# Altium PCB Driver4Rack.PcbDoc
Units mm, origin at the board's own origin, x right, y up, seen from the top; angles counter-clockwise.
Board outline 100 x 130 mm, 2 copper layers (Top Layer, Bottom Layer); 109 components, 96 nets, 554 pads, 60 vias.
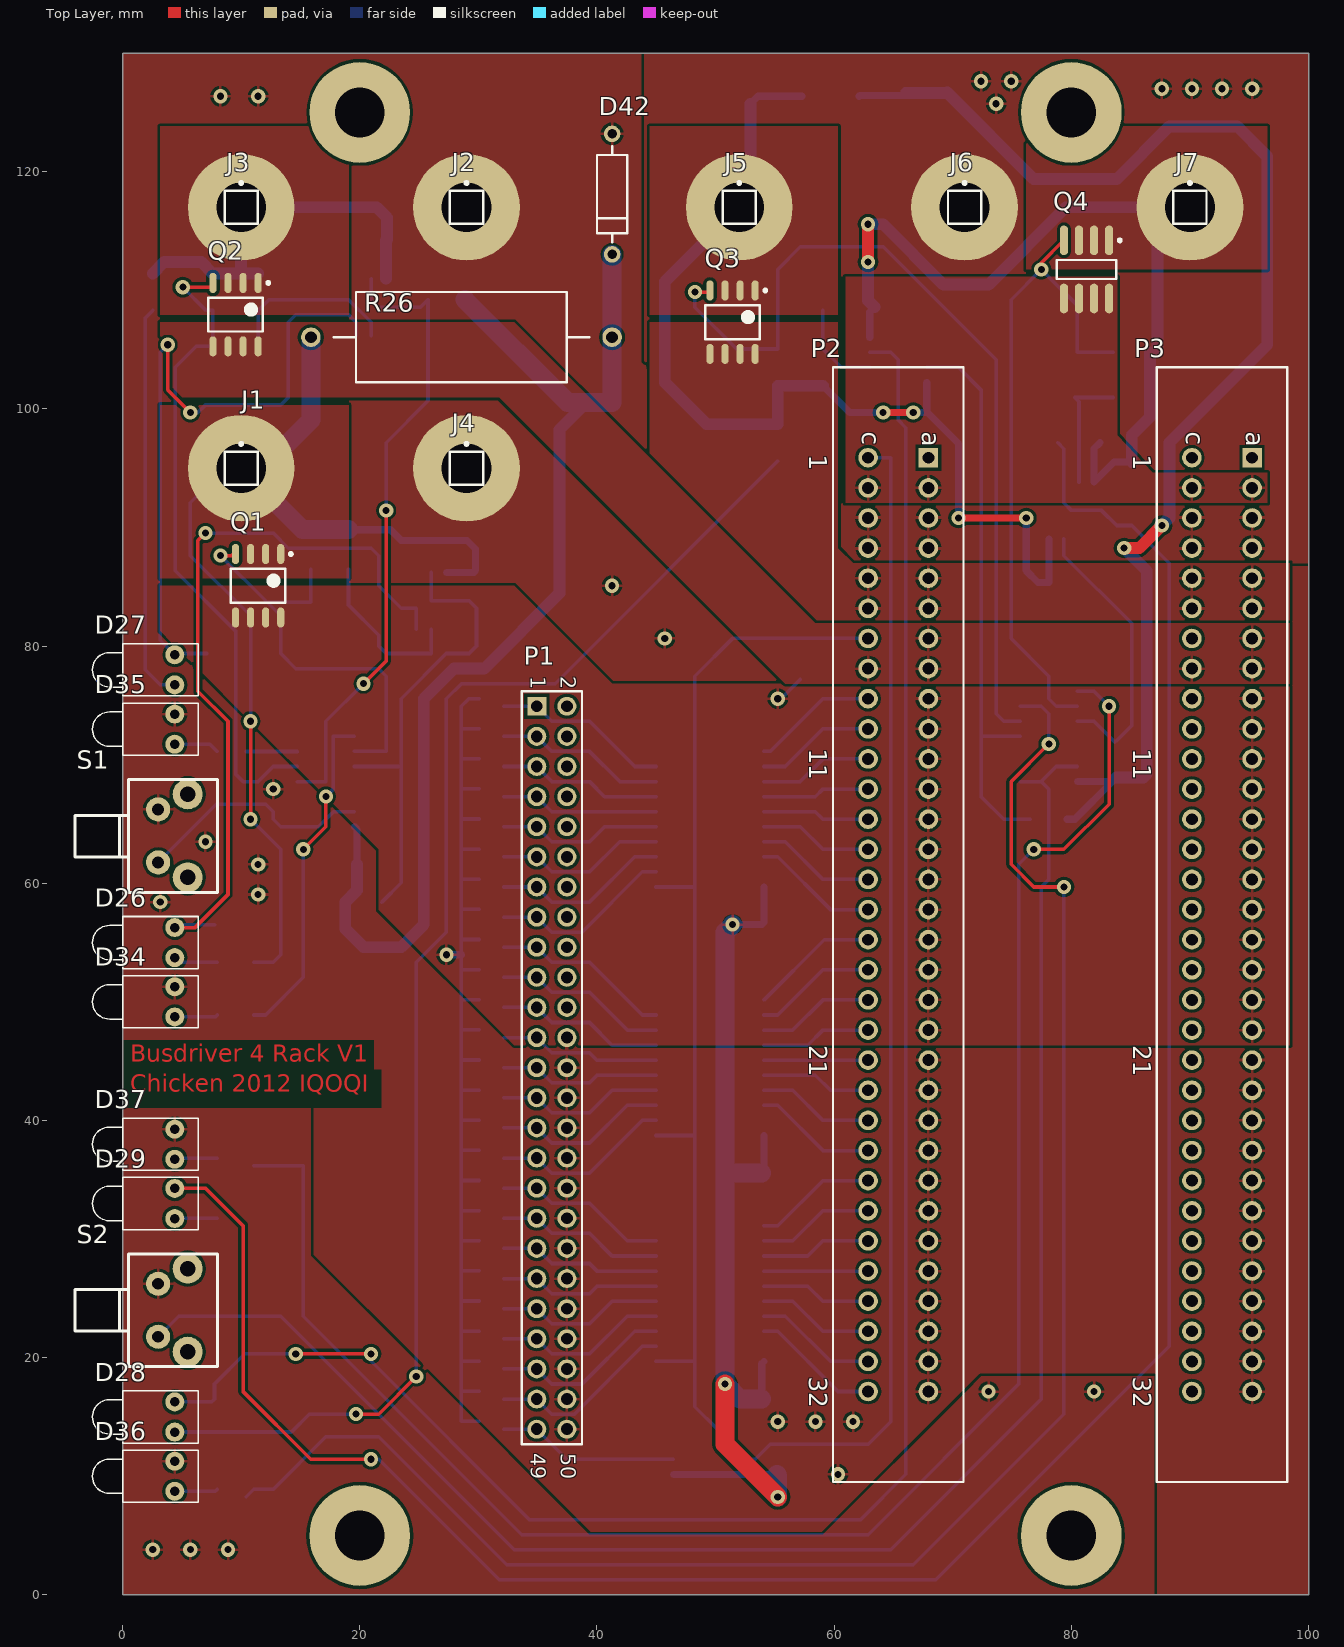
[diagram p0: Top Layer view]
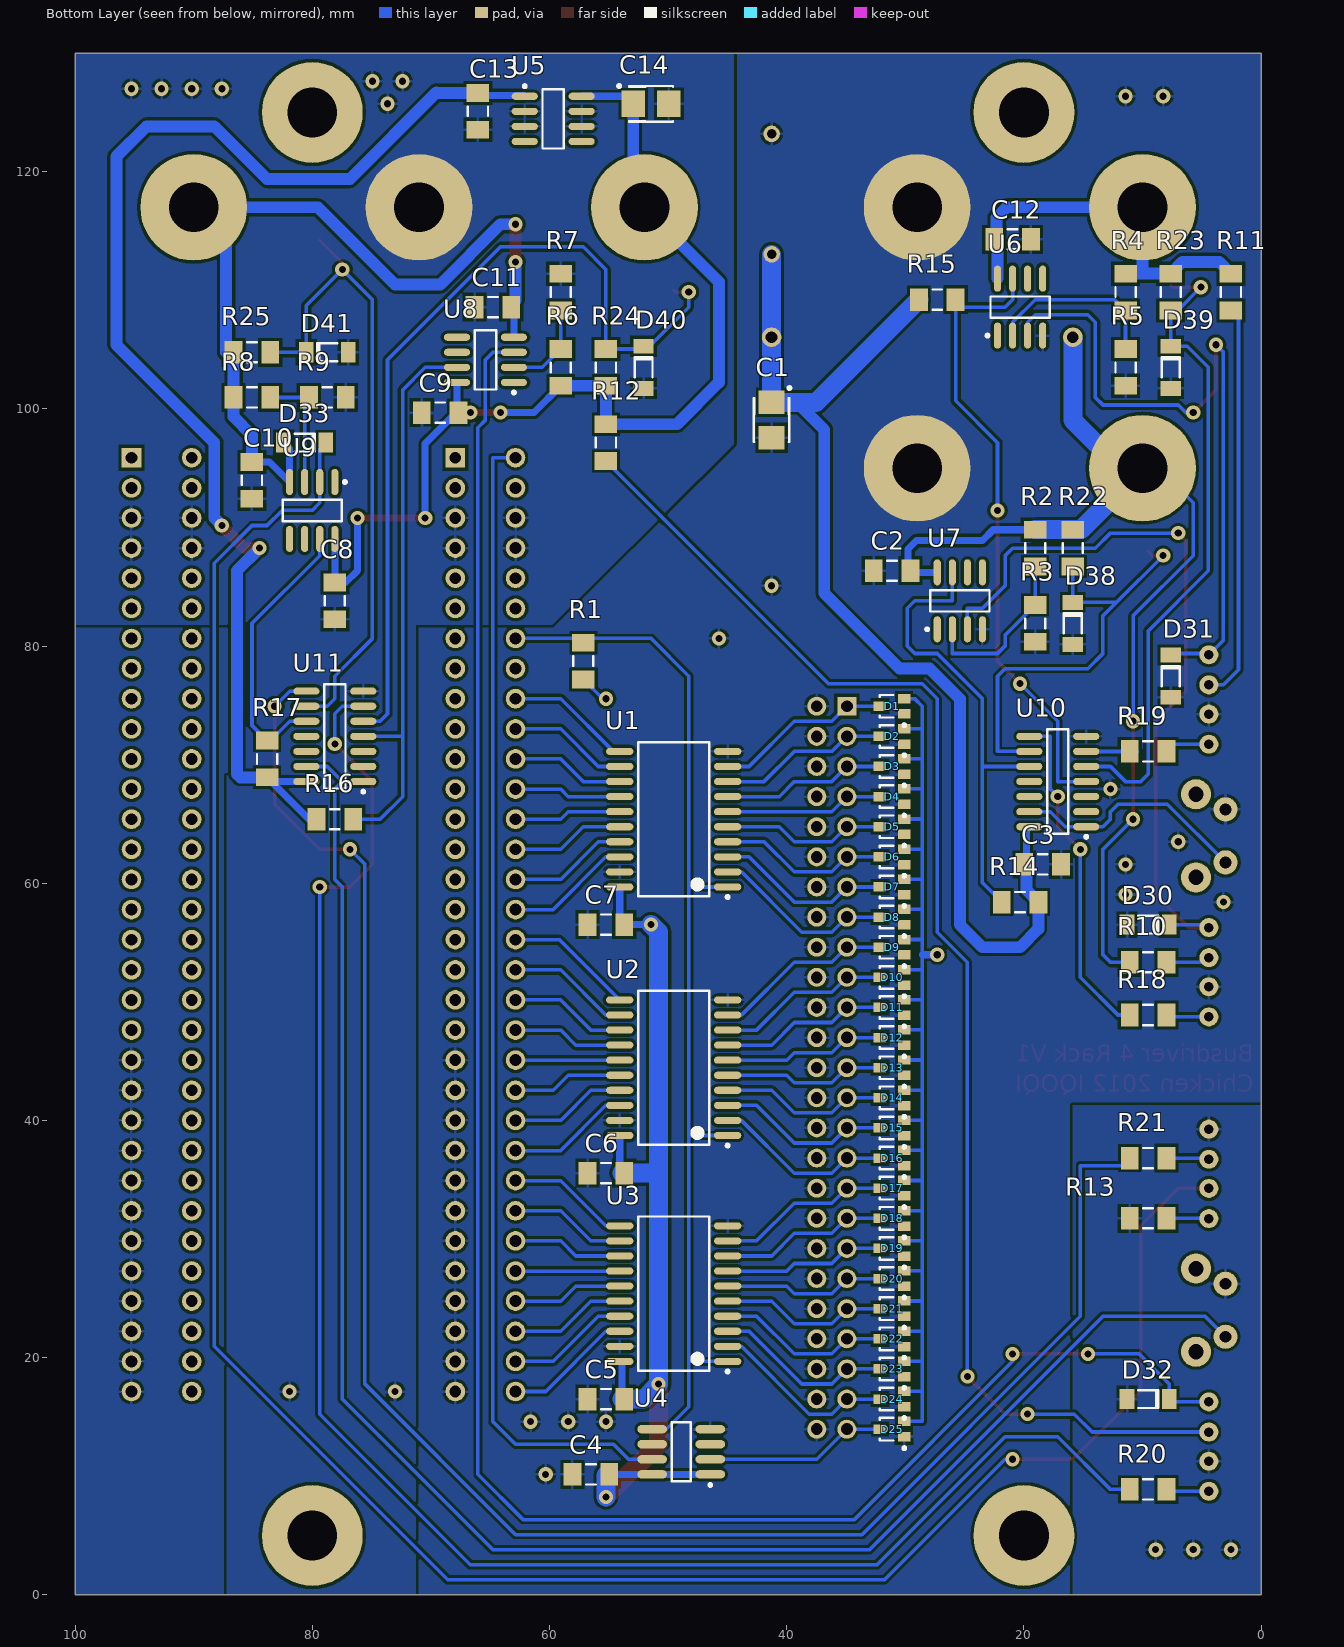
[diagram p1: Bottom Layer view, seen from below]

## Layer stack, top to bottom
Top Layer: signal copper 0.0356
Dielectric: dielectric 0.32, FR-4, Dk 4.8
Bottom Layer: signal copper 0.0356

## Board outline
0,0 100,0 100,130 0,130

## Design rules (kind name [scope] priority, off if disabled: settings)
Clearance Clearance_2 [InNet('+5V','++5V','+24V','++24V','+18V','++18V','-18V','--18V','DGND','AGND') vs InNet('+5V','++5V','+24V','++24V','+18V','++18V','-18V','--18V','DGND','AGND')] p1 off: gap=0.5
Clearance [All] p2: gap=0.254
HoleSize [All] p1: absolutevalues=TRUE maxlimit=5 minlimit=0.025 maxpercent=80.000 minpercent=20.000
PolygonConnect PolygonConnect_2 [InNet('+5V','++5V','+24V','++24V','+18V','++18V','-18V','--18V','DGND','AGND') vs ((ObjectKind = 'Pad') And (HoleDiameter = AsMM(4.2))) Or InComponent('Q1','Q2','Q3','Q4')] p1: connectstyle=Direct reliefconductorwidth=0.254 reliefentries=4 polygonreliefangle="90 Angle"
PolygonConnect [All] p2: connectstyle=Relief reliefconductorwidth=0.254 reliefentries=4 polygonreliefangle="90 Angle"
RoutingVias [All] p1: holewidth=0.6 width=1.2 viastyle="Through Hole" minholewidth=0.4 minwidth=1 maxholewidth=1 maxwidth=2
SilkscreenOverComponentPads [All] p1: minsilkscreentomaskgap=0.254
SolderMaskExpansion [All] p1: expansion=0.102
Width [All] p1: maxlimit=5 minlimit=0.254 preferedwidth=0.254
26 further rules are at their usual default settings.

## Components (designator, comment, footprint, x,y, rotation, side; value= is the part's Value field where it differs from the comment)
C1 "Cap Pol1" TC3528-1411 41.275,99.06 r270 bottom
C2 "Cap" CAPC3216M 31.115,86.36 r180 bottom
C3 "Cap" CAPC3216M 18.415,61.595 r0 bottom
C4 "Cap" CAPC3216M 56.515,10.16 r180 bottom
C5 "Cap" CAPC3216M 55.245,16.51 r180 bottom
C6 "Cap" CAPC3216M 55.245,35.56 r180 bottom
C7 "Cap" CAPC3216M 55.245,56.515 r180 bottom
C8 "Cap" CAPC3216M 78.105,83.82 r90 bottom
C9 "Cap" CAPC3216M 69.215,99.695 r180 bottom
C10 "Cap" CAPC3216M 85.09,93.98 r270 bottom
C11 "Cap" CAPC3216M 64.77,108.585 r0 bottom
C12 "Cap" CAPC3216M 20.955,114.3 r0 bottom
C13 "Cap" CAPC3216M 66.04,125.095 r90 bottom
C14 "Cap Pol1" TC3528-1411 51.435,125.73 r180 bottom
D1 "1PS70SB14" SOT323 31.115,74.93 r90 bottom
D2 "1PS70SB14" SOT323 31.115,72.39 r90 bottom
D3 "1PS70SB14" SOT323 31.115,69.85 r90 bottom
D4 "1PS70SB14" SOT323 31.115,67.31 r90 bottom
D5 "1PS70SB14" SOT323 31.115,64.77 r90 bottom
D6 "1PS70SB14" SOT323 31.115,62.23 r90 bottom
D7 "1PS70SB14" SOT323 31.115,59.69 r90 bottom
D8 "1PS70SB14" SOT323 31.115,57.15 r90 bottom
D9 "1PS70SB14" SOT323 31.115,54.61 r90 bottom
D10 "1PS70SB14" SOT323 31.115,52.07 r90 bottom
D11 "1PS70SB14" SOT323 31.115,49.53 r90 bottom
D12 "1PS70SB14" SOT323 31.115,46.99 r90 bottom
D13 "1PS70SB14" SOT323 31.115,44.45 r90 bottom
D14 "1PS70SB14" SOT323 31.115,41.91 r90 bottom
D15 "1PS70SB14" SOT323 31.115,39.37 r90 bottom
D16 "1PS70SB14" SOT323 31.115,36.83 r90 bottom
D17 "1PS70SB14" SOT323 31.115,34.29 r90 bottom
D18 "1PS70SB14" SOT323 31.115,31.75 r90 bottom
D19 "1PS70SB14" SOT323 31.115,29.21 r90 bottom
D20 "1PS70SB14" SOT323 31.115,26.67 r90 bottom
D21 "1PS70SB14" SOT323 31.115,24.13 r90 bottom
D22 "1PS70SB14" SOT323 31.115,21.59 r90 bottom
D23 "1PS70SB14" SOT323 31.115,19.05 r90 bottom
D24 "1PS70SB14" SOT323 31.115,16.51 r90 bottom
D25 "1PS70SB14" SOT323 31.115,13.97 r90 bottom
D26 "green" LED-1 4.4,55 r180 top
D27 "green" LED-1 4.4,78 r180 top
D28 "green" LED-1 4.4,15 r180 top
D29 "green" LED-1 4.4,33 r180 top
D30 "3,9V" sod80c 9.525,56.515 r180 bottom
D31 "22V" sod80c 7.62,77.47 r90 bottom
D32 "15V" sod80c 9.525,16.51 r180 bottom
D33 "15V" sod80c 80.645,97.155 r180 bottom
D34 "Red" LED-1 4.4,50 r180 top
D35 "Red" LED-1 4.4,73 r180 top
D36 "Red" LED-1 4.4,10 r180 top
D37 "Red" LED-1 4.4,38 r180 top
D38 "5,1V" sod80c 15.875,81.915 r90 bottom
D39 "5,1V" sod80c 7.62,103.505 r90 bottom
D40 "5,1V" sod80c 52.07,103.505 r90 bottom
D41 "5,1V" sod80c 78.74,104.775 r0 bottom
D42 "5V1/1W" DIODE-0.4 41.275,118.11 r270 top
J1 "+5V" PIN1 10,95 r0 top
J2 "DGND" PIN1 29,117 r0 top
J3 "+24V" PIN1 10,117 r0 top
J4 "DGND" PIN1 29,95 r0 top
J5 "+18V" PIN1 52,117 r0 top
J6 "AGND" PIN1 71,117 r0 top
J7 "-18V" PIN1 90,117 r0 top
P1 "Header 25X2" HDR2X25 34.925,74.93 r270 top
P2 "2x32 Pin" 0903164x922 65.405,56.515 r270 top
P3 "2x32 Pin" 0903164x922 92.71,56.515 r270 top
Q1 "TPC8120" 2-6J1B 11.43,85.09 r270 top
Q2 "TPC8120" 2-6J1B 9.525,107.95 r270 top
Q3 "TPC8120" 2-6J1B 51.435,107.315 r270 top
Q4 "FDS6699S" SO-8_M 81.28,111.76 r270 top
R1 "Res2" RESC3216M 57.15,78.74 r270 bottom
R2 "Res2" RESC3216M 19.05,88.265 r90 bottom
R3 "Res2" RESC3216M 19.05,81.915 r90 bottom
R4 "Res2" RESC3216M 11.43,109.855 r90 bottom
R5 "Res2" RESC3216M 11.43,103.505 r90 bottom
R6 "Res2" RESC3216M 59.055,103.505 r270 bottom
R7 "Res2" RESC3216M 59.055,109.855 r270 bottom
R8 "Res2" RESC3216M 85.09,100.965 r0 bottom
R9 "Res2" RESC3216M 78.74,100.965 r0 bottom
R10 "Res2" RESC3216M 9.525,53.34 r0 bottom
R11 "Res2" RESC3216M 2.54,109.855 r90 bottom
R12 "Res2" RESC3216M 55.245,97.155 r270 bottom
R13 "Res2" RESC3216M 9.525,31.75 r0 bottom
R14 "Res2" RESC3216M 20.32,58.42 r0 bottom
R15 "Res2" RESC3216M 27.305,109.22 r180 bottom
R16 "Res2" RESC3216M 78.105,65.405 r180 bottom
R17 "Res2" RESC3216M 83.82,70.485 r90 bottom
R18 "Res2" RESC3216M 9.525,48.895 r180 bottom
R19 "Res2" RESC3216M 9.525,71.12 r180 bottom
R20 "Res2" RESC3216M 9.525,8.89 r180 bottom
R21 "Res2" RESC3216M 9.525,36.83 r180 bottom
R22 "Res2" RESC3216M 15.875,88.265 r90 bottom
R23 "Res2" RESC3216M 7.62,109.855 r90 bottom
R24 "Res2" RESC3216M 55.245,103.505 r270 bottom
R25 "Res2" RESC3216M 85.09,104.775 r0 bottom
R26 "Res2" AXIAL-1.0 28.575,106.045 r0 top
S1 "SW-PB" Print-Taster 3,64 r270 top
S2 "SW-PB" Print-Taster 3,24 r270 top
U1 "SN74HC245DW" DW020_N 49.53,65.405 r0 bottom
U2 "SN74HC245DW" DW020_N 49.53,44.45 r0 bottom
U3 "SN74HC245DW" DW020_N 49.53,25.4 r0 bottom
U4 "SN74LVC2T45DCTT" SO8_M 48.895,12.065 r0 bottom
U5 "MC78L05ABD" 751-05_N 59.69,124.46 r180 bottom
U6 "LM311D" 751-02_N 20.32,108.585 r90 bottom
U7 "LM311D" 751-02_N 25.4,83.82 r90 bottom
U8 "LM311D" 751-02_N 65.405,104.14 r0 bottom
U9 "LM311D" 751-02_N 80.01,91.44 r270 bottom
U10 "MC74HC74AD" 751A-03_N 17.145,68.58 r0 bottom
U11 "MC74HC74AD" 751A-03_N 78.105,72.39 r0 bottom

## Footprints (in the part's own frame and the unit in brackets; to place one, negate y for a bottom-side part, rotate by r counter-clockwise, add the part's x,y. Pads: shape width x height; smd on the part's side, far side on the other; paste and mask are expansions set on the pad)
2-6J1B [mm] "Mosfet Toshiba TPC8120"
  oval 1.7x0.6 smd: 1(-2.675,1.905) 2(-2.675,0.635) 3(-2.675,-0.635) 4(-2.675,-1.905) 5(2.675,-1.905) 6(2.675,-0.635) 7(2.675,0.635) 8(2.675,1.905)
  silkscreen extent -2.8,-2.3 1.42,2.88, body extent -2.1,-2.3 2.1,2.3, height 1.7
751-02_N [mm] "SOIC, 8-Leads, Body 4.9x3.9mm, Pitch 1.27mm, IPC Medium Density"
  oval 2.2x0.6 smd: 1(-2.4,1.905) 2(-2.4,0.635) 3(-2.4,-0.635) 4(-2.4,-1.905) 5(2.4,-1.905) 6(2.4,-0.635) 7(2.4,0.635) 8(2.4,1.905)
  silkscreen extent -2.52,-2.5 0.9,2.88, body extent -1.95,-2.45 1.95,2.45, height 1.75
751-05_N [mm] "SOIC, 8-Leads, Body 4.9x3.9mm, Pitch 1.27mm, IPC Medium Density"
  oval 2.2x0.6 smd: 1(-2.4,1.905) 2(-2.4,0.635) 3(-2.4,-0.635) 4(-2.4,-1.905) 5(2.4,-1.905) 6(2.4,-0.635) 7(2.4,0.635) 8(2.4,1.905)
  silkscreen extent -2.53,-2.5 0.9,2.88, body extent -1.95,-2.45 1.95,2.45, height 1.75
751A-03_N [mm] "SOIC, 14-Leads, Body 8.7x3.9mm, Pitch 1.27mm, IPC Medium Density"
  oval 2.2x0.6 smd: 1(-2.4,3.81) 2(-2.4,2.54) 3(-2.4,1.27) 4(-2.4,0) 5(-2.4,-1.27) 6(-2.4,-2.54) 7(-2.4,-3.81) 8(2.4,-3.81) 9(2.4,-2.54) 10(2.4,-1.27) 11(2.4,0) 12(2.4,1.27) 13(2.4,2.54) 14(2.4,3.81)
  silkscreen extent -2.52,-4.4 0.9,4.78, body extent -2,-4.38 2,4.38, height 1.75
0903164x922 [mm] "Connector; DIN 41612, Type C, Thru-Hole; Rows a+c, 64 Position; Vertical; No Mounting Fixture"
  rect 1.65x1.65 hole 1: A1(-39.37,2.54)
  round 1.65 hole 1: A2(-36.83,2.54) A3(-34.29,2.54) A4(-31.75,2.54) A5(-29.21,2.54) A6(-26.67,2.54) A7(-24.13,2.54) A8(-21.59,2.54) A9(-19.05,2.54) A10(-16.51,2.54) A11(-13.97,2.54) A12(-11.43,2.54) A13(-8.89,2.54) A14(-6.35,2.54) A15(-3.81,2.54) A16(-1.27,2.54) A17(1.27,2.54) A18(3.81,2.54) A19(6.35,2.54) A20(8.89,2.54) A21(11.43,2.54) A22(13.97,2.54) A23(16.51,2.54) A24(19.05,2.54) A25(21.59,2.54) A26(24.13,2.54) A27(26.67,2.54) A28(29.21,2.54) A29(31.75,2.54) A30(34.29,2.54) A31(36.83,2.54) A32(39.37,2.54) C1(-39.37,-2.54) C2(-36.83,-2.54) C3(-34.29,-2.54) C4(-31.75,-2.54) C5(-29.21,-2.54) C6(-26.67,-2.54) C7(-24.13,-2.54) C8(-21.59,-2.54) C9(-19.05,-2.54) C10(-16.51,-2.54) C11(-13.97,-2.54) C12(-11.43,-2.54) C13(-8.89,-2.54) C14(-6.35,-2.54) C15(-3.81,-2.54) C16(-1.27,-2.54) C17(1.27,-2.54) C18(3.81,-2.54) C19(6.35,-2.54) C20(8.89,-2.54) C21(11.43,-2.54) C22(13.97,-2.54) C23(16.51,-2.54) C24(19.05,-2.54) C25(21.59,-2.54) C26(24.13,-2.54) C27(26.67,-2.54) C28(29.21,-2.54) C29(31.75,-2.54) C30(34.29,-2.54) C31(36.83,-2.54) C32(39.37,-2.54)
  silkscreen extent -47,-5.5 47,5.5
AXIAL-1.0 [mm] "Axial Device, Thru-Hole; 2 Leads; 1.0 in Pin Spacing"
  round 1.65 hole 1: 1(-12.7,0) 2(12.7,0)
  silkscreen extent -10.79,-3.81 10.79,3.81
CAPC3216M [mm] "Chip Capacitor, Body 3.2x1.6mm, IPC Low Density"
  rect 1.5x1.9 smd: 1(-1.55,0) 2(1.55,0)
  silkscreen extent -0.4,-0.85 0.4,0.85, body extent -1.7,-0.9 1.7,0.9, height 1.35
DIODE-0.4 [mm] "Diode, Thru-Hole; 2 Leads; 0.4 in Pin Spacing"
  round 1.4 hole 0.8: 1(-5.08,0) 2(5.08,0)
  silkscreen extent -4.06,-1.27 4.06,1.27
DW020_N [mm] "SOIC, 20-Leads, Body 12.8x7.5mm, Pitch 1.27mm, IPC Medium Density"
  oval 2.3x0.6 smd: 1(-4.55,5.715) 2(-4.55,4.445) 3(-4.55,3.175) 4(-4.55,1.905) 5(-4.55,0.635) 6(-4.55,-0.635) 7(-4.55,-1.905) 8(-4.55,-3.175) 9(-4.55,-4.445) 10(-4.55,-5.715) 11(4.55,-5.715) 12(4.55,-4.445) 13(4.55,-3.175) 14(4.55,-1.905) 15(4.55,-0.635) 16(4.55,0.635) 17(4.55,1.905) 18(4.55,3.175) 19(4.55,4.445) 20(4.55,5.715)
  silkscreen extent -4.67,-6.5 3,6.69, body extent -3.75,-6.4 3.75,6.4, height 2.65
HDR2X25 [mm] "Connector; Header; 25x2 Position"
  rect 1.6x1.6 hole 1: 1(0,0)
  round 1.6 hole 1: 2(0,2.54) 3(2.54,0) 4(2.54,2.54) 5(5.08,0) 6(5.08,2.54) 7(7.62,0) 8(7.62,2.54) 9(10.16,0) 10(10.16,2.54) 11(12.7,0) 12(12.7,2.54) 13(15.24,0) 14(15.24,2.54) 15(17.78,0) 16(17.78,2.54) 17(20.32,0) 18(20.32,2.54) 19(22.86,0) 20(22.86,2.54) 21(25.4,0) 22(25.4,2.54) 23(27.94,0) 24(27.94,2.54) 25(30.48,0) 26(30.48,2.54) 27(33.02,0) 28(33.02,2.54) 29(35.56,0) 30(35.56,2.54) 31(38.1,0) 32(38.1,2.54) 33(40.64,0) 34(40.64,2.54) 35(43.18,0) 36(43.18,2.54) 37(45.72,0) 38(45.72,2.54) 39(48.26,0) 40(48.26,2.54) 41(50.8,0) 42(50.8,2.54) 43(53.34,0) 44(53.34,2.54) 45(55.88,0) 46(55.88,2.54) 47(58.42,0) 48(58.42,2.54) 49(60.96,0) 50(60.96,2.54)
  silkscreen extent -1.27,-1.27 62.23,3.81
LED-1 [mm] "LED; 2 Leads"
  round 1.6 hole 0.8: 1(0,1.27) 2(0,-1.27)
  silkscreen extent -2,-2.2 6.95,2.2
PIN1 [mm] "Connector; Plug"
  round 9 hole 4.2: 1(0,0)
  silkscreen extent -1.4,-1.4 1.4,2.17
Print-Taster [mil]
  round 100 hole 51.18: 0(-138,98) 0(138,98)
  round 80 hole 39.37: 1(-88,0) 2(88,0)
  silkscreen extent -186,-276 188,197
RESC3216M [mm] "Chip Resistor, Body 3.2x1.6mm, IPC Low Density"
  rect 1.5x1.9 smd: 1(-1.55,0) 2(1.55,0)
  silkscreen extent -0.4,-0.85 0.4,0.85, body extent -1.68,-0.87 1.68,0.87, height 0.71
SO8_M [mm] "SOIC, 8-Leads, Body 4.9x3.9mm, Pitch 1.27mm, IPC Low Density"
  oval 2.5x0.7 smd: 1(-2.45,1.905) 2(-2.45,0.635) 3(-2.45,-0.635) 4(-2.45,-1.905) 5(2.45,-1.905) 6(2.45,-0.635) 7(2.45,0.635) 8(2.45,1.905)
  silkscreen extent -2.57,-2.5 0.8,2.93, body extent -2,-2.5 2,2.5, height 1.75
SO-8_M [mm] "SOIC, 8-Leads, Body 4.9x3.9mm, Pitch 1.27mm, IPC Low Density"
  oval 2.5x0.7 smd: 1(-2.45,1.905) 2(-2.45,0.635) 3(-2.45,-0.635) 4(-2.45,-1.905) 5(2.45,-1.905) 6(2.45,-0.635) 7(2.45,0.635) 8(2.45,1.905)
  silkscreen extent -2.57,-2.5 0.8,2.93, body extent -2,-2.5 2,2.5, height 1.75
sod80c [mm] "Metal Electrode Face (MELF) Diode; Body 3.5 x 1.6 mm (LxDia)"
  rect 1.25x1.7 smd: 1(-1.775,0) 2(1.775,0)
  silkscreen extent -0.85,-0.75 0.85,0.75
SOT323 [mm] "SOT-323/SC-70; 3 Leads; Body 2.2 x 2.2 mm, inc. leads (LxW max)"
  rect 0.8x1.05 smd: 1(-0.65,-1.025) 2(0.65,-1.025) 3(0,1.025)
  silkscreen extent -1.72,-1.15 0.95,1.03
TC3528-1411 [mm] "Capacitor, SM Tantalum; Body 3.5 x 2.8 mm (LxW typ)"
  rect 2x2.2 smd: 1(-1.5,0) 2(1.5,0)
  silkscreen extent -2.82,-1.5 1.85,1.62

## Part data
C1 C14: "Polarized Capacitor (Radial)"
C2 C3 C4 C5 C6 C7 C8 C9 C10 C11 C12 C13: "Capacitor"
D1 D2 D3 D4 D5 D6 D7 D8 D9 D10 D11 D12 D13 D14 D15 D16 D17 D18 D19 D20 D21 D22 D23 D24 D25: "Schottky Barrier Double Diode"
D26 D27 D28 D29 D34 D35 D36 D37: library part LED1, "Typical RED GaAs LED"
D30 D31 D32 D33 D38 D39 D40 D41 D42: library part "D Zener", "Zener Diode"
J1 J2 J3 J4 J5 J6 J7: library part Socket, "Socket"
P1: "Header, 25-Pin, Dual row"
P2 P3: library part "64 Pin Header", "DIN 41612"
Q1 Q2 Q3: "Mosfet P"
Q4: library part MOSFET-N, "N-Channel MOSFET"
R1 R2 R3 R4 R5 R6 R7 R8 R9 R10 R11 R12 R13 R14 R15 R16 R17 R18 R19 R20 R21 R22 R23 R24 R25 R26: "Resistor"
S1 S2: "Switch"
U1 U2 U3: "Octal Bus Transceiver with 3-State Outputs"
U4: library part SN74LVC2T45
U5: "Three-Terminal Low Current Positive Voltage Regulator"
U6 U7 U8 U9: "High-Performance Voltage Comparator"
U10 U11: "Dual D-Type Flip-Flop with Set and Reset"

## Free pads (board coordinates)
  round 8.5 hole 4.2: 0(20,5) 1(80,5) 2(80,125) 3(20,125)

## Via types
v1: diameter 1.2, hole 0.6, Top Layer to Bottom Layer, 60 vias

## Nets (pads, with @x,y where several pads share a name; then routed paths per layer and width w, separated by ;. In a path a pad name is that pad's centre, name@x,y a point inside that pad or via, vN(x,y) a via of type N, cw(c..) or ccw(c..) an arc to the next point about the centre after c; other vN are vias at no path point)
1: D1.3 P1.1 U1.9 | length 14.9
  Bottom Layer w0.3: D1.3 P1.1 36.195,73.66 39.37,73.66 43.18,69.85 U1.9
2: D2.3 P1.3 U1.8 | length 14.4
  Bottom Layer w0.3: D2.3 P1.3 36.195,71.12 39.37,71.12 41.91,68.58 U1.8
3: D3.3 P1.5 U1.7 | length 13.9
  Bottom Layer w0.3: D3.3 P1.5 36.195,68.58 39.37,68.58 40.64,67.31 U1.7
4: D4.3 P1.7 U1.6 | length 13.4
  Bottom Layer w0.3: D4.3 P1.7 36.195,66.04 U1.6
5: D5.3 P1.9 U1.5 | length 13.9
  Bottom Layer w0.3: D5.3 P1.9 36.195,63.5 39.37,63.5 40.64,64.77 U1.5
5V: C13.2 R16.1 R17.1 U5.1 U11.14 | length 111.8
  Top Layer w1: v1(84.455,88.265) 85.725,88.265 v1(87.63,90.17)
  Bottom Layer w0.3: R17.1@83.54,68.655 85.09,68.655
  Bottom Layer w0.6: U5.1 62.17,126.445 C13.2@66.04,126.445 ; R16.1 80.29,65.405 R17.1@83.465,68.58 ; U11.14 R17.1@83.465,68.58 ; R17.1 83.54,68.655 R17.1@83.465,68.58
  Bottom Layer w1: C13.2 69.495,126.645 69.532,126.682 76.835,119.38 83.82,119.38 88.265,123.825 93.98,123.825 96.52,121.285 96.52,105.41 88.265,97.155 88.265,90.805 v1(87.63,90.17) ; R17.1 86.08,68.935 86.36,69.215 86.36,86.36 v1(84.455,88.265)
6: D6.3 P1.11 U1.4 | length 14.4
  Bottom Layer w0.3: D6.3 P1.11 36.195,60.96 39.37,60.96 41.91,63.5 U1.4
7: D7.3 P1.13 U1.3 | length 14.9
  Bottom Layer w0.3: D7.3 P1.13 36.195,58.42 39.37,58.42 43.18,62.23 U1.3
8: D8.3 P1.15 U1.2 | length 15.5
  Bottom Layer w0.3: D8.3 P1.15 36.195,55.88 38.735,55.88 43.815,60.96 U1.2
9: D9.3 P1.17 U2.9 | length 15.2
  Bottom Layer w0.3: D9.3 P1.17 36.195,53.34 39.37,53.34 43.815,48.895 U2.9
10: D10.3 P1.19 U2.8 | length 14.7
  Bottom Layer w0.3: D10.3 P1.19 36.195,50.8 39.37,50.8 42.545,47.625 U2.8
11: D11.3 P1.21 U2.7 | length 14.2
  Bottom Layer w0.3: D11.3 P1.21 36.195,48.26 39.37,48.26 41.275,46.355 U2.7
12: D12.3 P1.23 U2.6 | length 13.6
  Bottom Layer w0.3: D12.3 P1.23 36.195,45.72 39.37,45.72 40.005,45.085 U2.6
13: D13.3 P1.25 U2.5 | length 13.6
  Bottom Layer w0.3: D13.3 P1.25 36.195,43.18 39.37,43.18 40.005,43.815 U2.5
14: D14.3 P1.27 U2.4 | length 14.2
  Bottom Layer w0.3: D14.3 P1.27 36.195,40.64 39.37,40.64 41.275,42.545 U2.4
15: D15.3 P1.29 U2.3 | length 14.7
  Bottom Layer w0.3: D15.3 P1.29 36.195,38.1 39.37,38.1 42.545,41.275 U2.3
16: D16.3 P1.31 U2.2 | length 15.2
  Bottom Layer w0.3: D16.3 P1.31 36.195,35.56 39.37,35.56 43.815,40.005 U2.2
17: D17.3 P1.33 U3.9 | length 14.7
  Bottom Layer w0.3: D17.3 P1.33 36.195,33.02 39.37,33.02 42.545,29.845 U3.9
18: D18.3 P1.35 U3.8 | length 14.2
  Bottom Layer w0.3: D18.3 P1.35 36.195,30.48 39.37,30.48 41.275,28.575 U3.8
19: D19.3 P1.37 U3.7 | length 13.6
  Bottom Layer w0.3: D19.3 P1.37 36.195,27.94 39.37,27.94 40.005,27.305 U3.7
20: D20.3 P1.39 U3.6 | length 13.6
  Bottom Layer w0.3: D20.3 P1.39 36.195,25.4 39.37,25.4 40.005,26.035 U3.6
21: D21.3 P1.41 U3.5 | length 14.2
  Bottom Layer w0.3: D21.3 P1.41 36.195,22.86 39.37,22.86 41.275,24.765 U3.5
22: D22.3 P1.43 U3.4 | length 14.7
  Bottom Layer w0.3: D22.3 P1.43 36.195,20.32 39.37,20.32 42.545,23.495 U3.4
23: D23.3 P1.45 U3.3 | length 15.2
  Bottom Layer w0.3: D23.3 P1.45 36.195,17.78 38.735,17.78 43.18,22.225 U3.3
24: D24.3 P1.47 U3.2 | length 15.7
  Bottom Layer w0.3: D24.3 P1.47 36.195,15.24 38.1,15.24 43.815,20.955 U3.2
25: D25.3 P1.49 U4.2 | length 15.4
  Bottom Layer w0.3: D25.3 P1.49 37.465,11.43 U4.2
+5V: C4.2 C5.2 C6.2 C7.2 D1.2 D2.2 D3.2 D4.2 D5.2 D6.2 D7.2 D8.2 D9.2 D10.2 D11.2 D12.2 D13.2 D14.2 D15.2 D16.2 D17.2 D18.2 D19.2 D20.2 D21.2 D22.2 D23.2 D24.2 D25.2 P2.A9 P2.A10 P2.A11 P2.A12 P2.A13 P2.A14 P2.A15 P2.A16 P2.A17 P2.A18 P2.A19 P2.A20 P3.A9 P3.A10 P3.A11 P3.A12 P3.A13 P3.A14 P3.A15 P3.A16 P3.A17 P3.A18 P3.A19 P3.A20 Q1.5 Q1.6 Q1.7 Q1.8 R1.2 U1.20 U2.20 U3.20 U4.1 U4.8 | length 182.5
  Top Layer w1.6: v1(50.8,17.78) 50.8,12.7 v1(55.245,8.255)
  Bottom Layer w0.3: 28.575,17.16 D24.2 ; 28.575,27.32 D20.2 ; 28.575,29.86 D19.2 ; 28.575,34.94 D17.2 ; 28.575,47.64 D12.2 ; D25.2 28.56,14.62 28.56,19.7 ; D23.2 28.56,19.7 ; D22.2 28.56,22.24 ; D21.2 28.56,24.78 ; D18.2 28.56,32.4 ; D16.2 28.56,37.48 ; D15.2 28.56,40.02 ; D14.2 28.56,42.56 ; D13.2 28.56,45.1 ; D11.2 28.56,50.18 ; D10.2 28.56,52.72 ; D9.2 28.56,55.26 ; D8.2 28.56,57.8 ; D7.2 28.56,60.34 ; D6.2 28.56,62.88 ; D5.2 28.56,65.42 ; D4.2 28.56,67.96 ; D3.2 28.56,70.5 ; D2.2 28.56,73.04 ; D1.2 29.225,75.58 28.56,74.915 28.56,73.04 ; v1(55.245,75.565) 55.525,75.565 R1.2 ; 28.56,19.7 28.56,22.24 ; 28.56,22.24 28.56,24.78 ; 28.56,24.78 28.56,32.4 ; 28.56,32.4 28.56,37.48 ; 28.56,37.48 28.56,40.02 ; 28.56,40.02 28.56,42.56 ; 28.56,42.56 28.56,45.1 ; 28.56,45.1 28.56,50.18 ; 28.56,50.18 28.56,52.72 ; 28.56,52.72 28.56,53.975 28.56,55.26 ; 28.56,55.26 28.56,57.8 ; 28.56,57.8 28.56,60.34 ; 28.56,60.34 28.56,62.88 ; 28.56,62.88 28.56,65.42 ; 28.56,65.42 28.56,67.96 ; 28.56,67.96 28.56,70.5 ; 28.56,70.5 28.56,73.04
  Bottom Layer w0.6: v1(27.305,53.975) 28.56,53.975 ; U4.1 U4.8 C4.2 C4.2@55.165,10.16 ; v1(51.435,56.515) 53.895,56.515 54.08,56.7 U1.20 ; C5.2@53.895,16.51 53.895,19.5 U3.20 ; C6.2@53.895,35.56 54.08,35.745 U2.20
  Bottom Layer w1.6: v1(51.435,56.515) 50.8,55.88 50.8,35.56 ; C5.2@53.895,16.51 52.07,16.51 v1(50.8,17.78) 50.8,35.56 ; C6.2@53.895,35.56 50.8,35.56 ; C4.2@55.165,10.16 55.245,10.08 v1(55.245,8.255)
+5VTTL: C1.1 C3.2 D42.2 R14.1 R15.1 R26.2 U10.14 | length 96.9
  Bottom Layer w0.6: U10.14 19.765,64.55 C3.2@19.765,61.595
  Bottom Layer w1: C3.2@19.765,61.595 19.765,59.415 R14.1 18.77,56.16 20.32,54.61 23.495,54.61 25.4,56.515 25.4,75.565 27.94,78.105 30.48,78.105 36.83,84.455 36.83,98.25 39.14,100.56
  Bottom Layer w1.6: R15.1 37.515,100.56 39.14,100.56 C1.1 R26.2 D42.2
+18V: P2.A5 P2.A6 P2.C5 P2.C6 P3.A5 P3.A6 P3.C5 P3.C6 Q3.5 Q3.6 Q3.7 Q3.8
+24V: P2.A7 P2.A8 P2.C8 P3.A7 P3.A8 P3.C8 Q2.5 Q2.6 Q2.7 Q2.8
++5V: C2.2 J1.1 Q1.1 Q1.2 Q1.3 R2.2 R10.2 R22.2 R26.1 U7.8 | length 90.7
  Top Layer w0.3: v1(10.795,65.405) v1(10.795,73.66)
  Bottom Layer w0.3: J1.1 8.64,95 5.715,92.075 5.715,87.63 10.795,82.55 v1(10.795,73.66) ; v1(10.795,65.405) 13.335,62.865 13.335,53.975 12.7,53.34 R10.2
  Bottom Layer w0.6: R2.2 22.58,89.815 23.495,88.9 29.05,88.9 29.765,88.185 29.765,86.36 29.625,86.22 U7.8
  Bottom Layer w1.6: R26.1 15.875,99.06 11.815,95 J1.1 15.185,89.815 R22.2 R2.2
++18V: C8.2 C9.2 C14.1 J5.1 Q3.1 Q3.2 Q3.3 R6.2 R12.1 R24.2 U5.8 U8.8 U9.8 | length 87.6
  Top Layer w0.6: v1(64.135,99.695) v1(66.675,99.695) ; v1(70.485,90.805) v1(76.2,90.805)
  Bottom Layer w0.6: C14.1 53.57,126.365 U5.8 ; R6.2 61.315,99.695 v1(64.135,99.695) ; v1(66.675,99.695) C9.2@67.865,99.695 ; U8.8 67.805,99.755 C9.2@67.865,99.695 ; v1(70.485,90.805) 70.485,97.075 C9.2@67.865,99.695 ; v1(76.2,90.805) 76.2,86.36 77.19,85.37 C8.2 U9.8
  Bottom Layer w1: C14.1 52.935,117.935 J5.1 45.72,110.72 45.72,102.235 49.25,98.705 R12.1 R24.2 R6.2
++24V: C12.2 J3.1 Q2.1 Q2.2 Q2.3 R4.2 R11.2 R23.2 U6.8 | length 33
  Bottom Layer w1: R11.2 3.53,112.395 6.63,112.395 R23.2 R4.2 ; 10,111.565 J3.1 21.43,117 22.305,116.125 22.305,114.3 22.225,114.22 U6.8
-18V: P2.A2 P2.C2 P3.A2 P3.C2 Q4.5 Q4.6 Q4.7 Q4.8
--18V: C10.1 C11.1 D33.1 J7.1 Q4.1 Q4.2 Q4.3 R8.2 R25.2 U8.4 U9.4 | length 72.5
  Top Layer w1: v1(62.865,112.395) v1(62.865,115.57)
  Bottom Layer w0.6: U8.4 63.005,108.17 C11.1@63.42,108.585 ; D33.1 81.915,96.65 U9.4 83.605,95.53 C10.1
  Bottom Layer w1: v1(62.865,112.395) 62.865,109.14 C11.1@63.42,108.585 ; v1(62.865,115.57) 64.135,115.57 69.215,110.49 73.025,110.49 79.535,117 J7.1 87.275,114.275 R25.2@87.275,104.775 ; C10.1 85.09,97.79 86.64,99.34 R8.2 R25.2
A0: P2.C25 U3.11 | length 10.4
  Bottom Layer w0.3: U3.11 55.245,31.115 59.055,34.925 P2.C25
A1: P2.C26 U3.12 | length 9.8
  Bottom Layer w0.3: U3.12 56.515,29.845 59.055,32.385 P2.C26
A2: P2.C27 U3.13 | length 9.3
  Bottom Layer w0.3: U3.13 57.785,28.575 59.055,29.845 P2.C27
A3: P2.C28 U3.14 | length 8.8
  Bottom Layer w0.3: U3.14 P2.C28
A4: P2.C29 U3.15 | length 9.3
  Bottom Layer w0.3: U3.15 57.785,26.035 59.055,24.765 P2.C29
A5: P2.C30 U3.16 | length 9.8
  Bottom Layer w0.3: U3.16 56.515,24.765 59.055,22.225 P2.C30
A6: P2.C31 U3.17 | length 10.4
  Bottom Layer w0.3: U3.17 55.88,23.495 59.69,19.685 P2.C31
A7: P2.C32 U3.18 | length 10.9
  Bottom Layer w0.3: U3.18 55.245,22.225 60.325,17.145 P2.C32
AGND: C8.1 C9.1 C10.2 C11.2 C13.1 C14.2 D32.1 D36.2 D37.2 D40.1 D41.1 J6.1 P2.A3 P2.A4 P2.C3 P2.C4 P3.A3 P3.A4 P3.C3 P3.C4 R7.1 R9.1 R13.2 S2.1 U5.2 U5.3 U5.6 U5.7 U11.7
  other v1: 2.54,3.81 5.715,3.81 8.89,3.81 73.025,17.145 81.915,17.145 73.66,125.73 87.63,127 90.17,127 92.71,127 95.25,127 72.39,127.635 74.93,127.635
D00: P2.C9 U1.11 | length 10.6
  Bottom Layer w0.3: U1.11 54.61,71.12 59.055,75.565 P2.C9
D01: P2.C10 U1.12 | length 10.1
  Bottom Layer w0.3: U1.12 55.88,69.85 59.055,73.025 P2.C10
D02: P2.C11 U1.13 | length 9.6
  Bottom Layer w0.3: U1.13 57.15,68.58 59.055,70.485 P2.C11
D03: P2.C12 U1.14 | length 9
  Bottom Layer w0.3: U1.14 58.42,67.31 59.055,67.945 P2.C12
D04: P2.C13 U1.15 | length 9
  Bottom Layer w0.3: U1.15 58.42,66.04 59.055,65.405 P2.C13
D05: P2.C14 U1.16 | length 9.6
  Bottom Layer w0.3: U1.16 57.15,64.77 59.055,62.865 P2.C14
D06: P2.C15 U1.17 | length 10.1
  Bottom Layer w0.3: U1.17 55.88,63.5 59.055,60.325 P2.C15
D07: P2.C16 U1.18 | length 10.6
  Bottom Layer w0.3: U1.18 55.245,62.23 59.69,57.785 P2.C16
D08: P2.C17 U2.11 | length 10.9
  Bottom Layer w0.3: U2.11 59.16,55.245 P2.C17
D09: P2.C18 U2.12 | length 10.4
  Bottom Layer w0.3: U2.12 55.245,48.895 59.055,52.705 P2.C18
D10: P2.C19 U2.13 | length 9.8
  Bottom Layer w0.3: U2.13 56.515,47.625 59.055,50.165 P2.C19
D11: P2.C20 U2.14 | length 9.3
  Bottom Layer w0.3: U2.14 57.785,46.355 59.055,47.625 P2.C20
D12: P2.C21 U2.15 | length 8.8
  Bottom Layer w0.3: U2.15 P2.C21
D13: P2.C22 U2.16 | length 9.3
  Bottom Layer w0.3: U2.16 58.42,43.815 59.69,42.545 P2.C22
D14: P2.C23 U2.17 | length 9.8
  Bottom Layer w0.3: U2.17 56.515,42.545 59.055,40.005 P2.C23
D15: P2.C24 U2.18 | length 10.4
  Bottom Layer w0.3: U2.18 55.245,41.275 59.055,37.465 P2.C24
DGND: C1.2 C2.1 C3.1 C4.1 C5.1 C6.1 C7.1 C12.1 D1.1 D2.1 D3.1 D4.1 D5.1 D6.1 D7.1 D8.1 D9.1 D10.1 D11.1 D12.1 D13.1 D14.1 D15.1 D16.1 D17.1 D18.1 D19.1 D20.1 D21.1 D22.1 D23.1 D24.1 D25.1 D30.1 D31.1 D34.2 D35.2 D38.1 D39.1 D42.1 J2.1 J4.1 P1.2 P1.4 P1.6 P1.8 P1.10 P1.12 P1.14 P1.16 P1.18 P1.20 P1.22 P1.24 P1.26 P1.28 P1.30 P1.32 P1.34 P1.36 P1.38 P1.40 P1.42 P1.44 P1.46 P1.48 P1.50 P2.A21 P2.A22 P2.A23 P2.A24 P2.A25 P2.A26 P2.A27 P2.A28 P2.A29 P2.A30 P2.A31 P2.A32 P3.A21 P3.A22 P3.A23 P3.A24 P3.A25 P3.A26 P3.A27 P3.A28 P3.A29 P3.A30 P3.A31 P3.A32 R3.1 R5.1 S1.1 U1.10 U1.19 U2.10 U2.19 U3.10 U3.19 U4.4 U6.4 U7.4 U10.7
  other v1: 60.325,10.16 55.245,14.605 58.42,14.605 61.595,14.605 3.175,58.42 11.43,59.055 11.43,61.595 6.985,63.5 12.7,67.945 45.72,80.645 41.275,85.09 8.255,126.365 11.43,126.365
DIRECT: P2.C7 R1.1 U1.1 U2.1 U3.1 U4.5 | length 91.2
  Bottom Layer w0.3: U3.1 48.26,19.685 ; U2.1 48.26,38.735 ; U1.1 48.26,59.69 ; U4.5 50.165,13.97 48.26,15.875 48.26,19.685 ; P2.C7 51.435,80.645 48.26,77.47 48.26,59.69 ; 48.26,19.685 48.26,38.735 ; 48.26,38.735 48.26,59.69
GND: 
NetD26_1: D26.1 R10.1 | length 3.7
  Bottom Layer w0.3: D26.1 4.79,53.34 R10.1
NetD26_2: D26.2 D30.2 U7.3 | length 64.6
  Top Layer w0.3: D26.2 6.105,56.27 8.89,59.055 8.89,73.66 6.35,76.2 6.35,88.9 v1(6.985,89.535)
  Bottom Layer w0.3: D26.2 4.645,56.515 D30.2 ; v1(6.985,89.535) 12.7,89.535 13.97,88.265 20.955,88.265 21.59,87.63 21.59,85.09 23.495,83.185 24.765,83.185 U7.3
NetD27_1: D27.1 R11.1 | length 33.6
  Bottom Layer w0.3: R11.1 1.905,107.67 1.905,78 3.175,76.73 D27.1
NetD27_2: D27.2 D31.2 U6.3 | length 58.7
  Top Layer w0.3: v1(3.81,105.41) 3.81,101.6 v1(5.715,99.695)
  Bottom Layer w0.3: v1(3.81,105.41) 3.175,104.775 3.175,80.495 D27.2@4.295,79.375 ; D27.2 D27.2@4.295,79.375 ; v1(5.715,99.695) 6.35,99.695 6.985,100.33 13.335,100.33 13.97,100.965 13.97,107.315 14.605,107.95 19.05,107.95 19.685,107.315 U6.3 ; D31.2@7.115,79.375 D27.2@4.295,79.375
NetD28_1: D28.1 R12.2 | length 116.7
  Top Layer w0.3: v1(19.685,15.24) 21.59,15.24 v1(24.765,18.415)
  Bottom Layer w0.3: D28.1 14.24,13.73 15.75,15.24 v1(19.685,15.24) ; v1(24.765,18.415) 24.765,53.34 27.305,55.88 27.305,75.565 28.575,76.835 36.475,76.835 R12.2
NetD28_2: D28.2 D32.2 U8.3 | length 168.7
  Top Layer w0.3: v1(14.605,20.32) v1(20.955,20.32)
  Bottom Layer w0.3: D28.2 7.51,16.27 D32.2 7.75,17.78 10.29,20.32 v1(14.605,20.32) ; v1(20.955,20.32) 20.955,19.685 34.29,6.35 62.23,6.35 66.04,10.16 66.04,98.425 65.405,99.06 65.405,104.14 64.77,104.775 U8.3
NetD29_1: D29.1 R13.1 | length 3.6
  Bottom Layer w0.3: D29.1 4.42,31.75 R13.1
NetD29_2: D29.2 D33.2 U9.2 | length 196.2
  Top Layer w0.3: D29.2 7.005,34.27 10.16,31.115 10.16,17.145 15.875,11.43 v1(20.955,11.43)
  Bottom Layer w0.3: v1(20.955,11.43) 21.59,11.43 31.75,1.27 68.58,1.27 88.265,20.955 88.265,86.995 85.09,90.17 83.82,90.17 82.55,91.44 80.01,91.44 79.375,92.075 U9.2 79.375,96.65 D33.2
NetD34_1: D34.1 R18.2 | length 3.6
  Bottom Layer w0.3: D34.1 7.81,48.73 R18.2
NetD35_1: D35.1 R19.2 | length 3.8
  Bottom Layer w0.3: D35.1 7.365,71.73 R19.2
NetD36_1: D36.1 R20.2 | length 3.6
  Bottom Layer w0.3: D36.1 7.815,8.73 R20.2
NetD37_1: D37.1 R21.2 | length 3.6
  Bottom Layer w0.3: D37.1 4.5,36.83 R21.2
NetD38_2: D38.2 Q1.4 R22.1 U10.9 | length 37
  Top Layer w0.3: v1(8.255,87.63) 9.165,87.63 Q1.4@9.525,87.99
  Bottom Layer w0.3: v1(8.255,87.63) 12.195,83.69 ; R22.1@15.875,86.49 D38.2 12.195,83.69 ; U10.9 22.225,71.12 22.225,77.47 21.59,78.105 14.605,78.105 13.335,79.375 13.335,82.55 12.195,83.69
NetD39_2: D39.2 Q2.4 R23.1 U10.5 | length 55.3
  Top Layer w0.3: v1(5.08,110.265) 7.485,110.265 Q2.4@7.62,110.4
  Bottom Layer w0.3: v1(5.08,110.265) 7.04,108.305 R23.1 D39.2 6.22,105.28 4.445,103.505 4.445,86.36 9.525,81.28 9.525,69.215 10.16,68.58 11.43,68.58 12.7,69.85 U10.5
NetD40_2: D40.2 Q3.4 R24.1 U11.5 | length 72.8
  Top Layer w0.3: v1(48.26,109.855) 49.395,109.855 Q3.4
  Bottom Layer w0.3: v1(48.26,109.855) 48.26,108.585 D40.2@51.79,105.055 ; D40.2@52.07,105.055 R24.1 55.245,111.76 57.15,113.665 64.135,113.665 73.66,104.14 73.66,74.295 74.295,73.66 U11.5
NetD41_2: D41.2 Q4.4 R25.1 U11.9 | length 55.7
  Top Layer w0.3: v1(77.47,111.76) 77.47,112.305 Q4.4
  Bottom Layer w0.3: U11.9 78.74,74.93 78.105,75.565 78.105,77.47 74.93,80.645 74.93,109.22 v1(77.47,111.76) 80.515,108.715 D41.2 81.15,104.775 R25.1
NetR2_1: R2.1 R3.2 U7.2 | length 14.3
  Bottom Layer w0.3: R2.1@19.05,86.49 R3.2 21.59,80.925 21.59,80.01 22.225,79.375 26.035,79.375 U7.2
NetR4_1: R4.1 R5.2 U6.2 | length 15.1
  Bottom Layer w0.3: R5.2 R4.1 12.345,109.22 19.05,109.22 20.955,107.315 U6.2
NetR6_1: R6.1 R7.2 U8.2 | length 7.8
  Bottom Layer w0.3: R7.2 R6.1 60.605,103.505 U8.2
NetR8_1: R8.1 R9.2 U9.3 | length 10.5
  Bottom Layer w0.3: U9.3 80.645,100.61 R9.2 81.915,100.965 R8.1
NetR14_2: R14.2 U7.7 U10.10 | length 39.6
  Bottom Layer w0.3: U10.10 23.495,69.85 ; R14.2 23.495,60.045 23.495,69.85 ; U7.7 26.035,83.82 29.21,83.82 29.845,83.185 29.845,80.01 29.21,79.375 27.305,79.375 23.495,75.565 23.495,69.85
NetR15_2: R15.2 U6.7 U10.4 | length 53.7
  Top Layer w0.3: v1(20.32,76.835) 22.225,78.74 v1(22.225,91.44)
  Bottom Layer w0.3: U10.4 17.145,68.58 17.145,73.66 v1(20.32,76.835) ; U6.7 20.955,109.22 21.59,108.585 25.12,108.585 R15.2 25.755,100.685 22.225,97.155 v1(22.225,91.44)
NetR16_2: R16.2 U8.7 U11.4 | length 47.9
  Bottom Layer w0.3: U8.7 70.485,103.505 72.39,101.6 72.39,72.39 ; U11.4 72.39,72.39 ; R16.2 74.295,65.405 72.39,67.31 72.39,72.39
NetR17_2: R17.2 U9.7 U11.10 | length 23.8
  Bottom Layer w0.3: U9.7 79.375,87.63 85.09,81.915 85.09,73.305 R17.2 ; U11.10 81.915,73.66 R17.2@83.68,71.895
NetR18_1: R18.1 U10.8 | length 28.6
  Top Layer w0.3: v1(15.24,62.865) 17.145,64.77 v1(17.145,67.31)
  Bottom Layer w0.3: R18.1 12.065,48.895 15.24,52.07 v1(15.24,62.865) ; v1(17.145,67.31) 17.78,67.945 17.78,72.39 U10.8
NetR19_1: R19.1 U10.6 | length 4.3
  Bottom Layer w0.3: R19.1@10.44,71.115 14.74,71.115 U10.6
NetR20_1: R20.1 U11.6 | length 147.1
  Top Layer w0.3: v1(78.105,71.755) 74.93,68.58 74.93,61.595 76.835,59.69 v1(79.375,59.69)
  Bottom Layer w0.3: R20.1@10.44,8.26 R20.1@11.072,8.892 ; R20.1 12.7,8.89 17.145,13.335 21.59,13.335 32.385,2.54 66.675,2.54 79.375,15.24 v1(79.375,59.69) ; U11.6 77.47,74.93 78.105,74.295 v1(78.105,71.755)
NetR21_1: R21.1 U11.8 | length 155.1
  Top Layer w0.3: v1(76.835,62.865) 79.375,62.865 83.185,66.675 v1(83.185,74.93)
  Bottom Layer w0.3: R21.1@11.075,36.2 15.235,36.2 15.235,23.5 33.655,5.08 62.865,5.08 75.565,17.78 75.565,61.595 v1(76.835,62.865) ; U11.8 81.915,76.2 v1(83.185,74.93)
RESETANALOG: S2.2 U11.1 U11.13 | length 146.5
  Bottom Layer w0.3: S2.2 4.73,23.495 13.335,23.495 33.02,3.81 64.77,3.81 77.47,16.51 77.47,59.69 78.105,60.325 78.105,67.945 77.47,68.58 ; U11.1 77.47,68.58 ; U11.13 78.74,69.85 77.47,68.58
RESETDIG: S1.2 U10.1 U10.13 | length 20.3
  Bottom Layer w0.3: S1.2 7.91,66.675 12.065,66.675 12.7,66.04 12.7,65.405 13.335,64.77 U10.1 16.51,64.77 17.78,66.04 U10.13
STROBE: P2.C1 U4.7 | length 97.9
  Bottom Layer w0.3: U4.7 53.34,11.43 54.61,12.7 62.865,12.7 64.77,14.605 64.77,95.885 P2.C1
SYNC: P2.A1
VDD: 
pads on no net: P3.A1 P3.C1 P3.C7 P3.C9 P3.C10 P3.C11 P3.C12 P3.C13 P3.C14 P3.C15 P3.C16 P3.C17 P3.C18 P3.C19 P3.C20 P3.C21 P3.C22 P3.C23 P3.C24 P3.C25 P3.C26 P3.C27 P3.C28 P3.C29 P3.C30 P3.C31 P3.C32 S1.0 S2.0 U4.3 U4.6 U5.4 U5.5 U6.1 U6.5 U6.6 U7.1 U7.5 U7.6 U8.1 U8.5 U8.6 U9.1 U9.5 U9.6 U10.2 U10.3 U10.11 U10.12 U11.2 U11.3 U11.11 U11.12

## Polygon pours and split planes (outlines as drawn)
DGND on Bottom Layer "BottomLayer-No Net" (solid, pour order 35): 0,130 0,0 100,0 100,130
AGND on Bottom Layer "BottomLayer-No Net" (solid, pour order 34): 44.45,130 44.45,97.024 59.774,81.805 71.267,81.805 71.267,0 87.23,0 87.23,81.805 100,81.805 100,130
AGND on Bottom Layer "BottomLayer-No Net" (solid, pour order 33): 0,0 0,41.275 15.875,41.275 15.875,0
AGND on Top Layer "BottomLayer-No Net" (solid, pour order 32): 44,130 44,104 61,87 100,87 100,130
DGND on Top Layer "BottomLayer-No Net" (solid, pour order 40): 0,0 100,0 100,130 0,130
AGND on Top Layer "BottomLayer-No Net" (solid, pour order 37): 0,0 0,41.275 15.875,41.275 15.875,28.575 39.37,5.08 59.055,5.08 71.12,17.145 72.39,18.415 73.025,18.415 86.995,18.415 86.995,0
++18V on Top Layer "BottomLayer-No Net" (solid, pour order 25): 44.45,123.825 60.325,123.825 60.325,107.95 44.45,107.95
+18V on Top Layer "BottomLayer-No Net" (solid, pour order 31): 98.425,81.915 98.425,86.995 61.595,86.995 60.325,88.265 60.325,107.315 44.45,107.315 44.45,93.98 56.515,81.915 63.5,81.915
--18V on Top Layer "BottomLayer-No Net" (solid, pour order 27): 96.52,123.825 96.52,111.76 76.2,111.76 76.2,123.825
-18V on Top Layer "BottomLayer-No Net" (solid, pour order 28): 96.52,92.075 96.52,94.615 86.877,94.615 83.863,97.79 83.863,109.22 83.863,111.125 60.96,111.125 60.96,92.075
++24V on Top Layer "BottomLayer-No Net" (solid, pour order 30): 3.175,123.825 19.05,123.825 19.05,107.95 3.175,107.95
+5V on Top Layer "BottomLayer-No Net" (solid, pour order 36): 98.425,76.835 98.425,46.355 33.02,46.355 21.59,57.785 21.59,62.865 3.175,81.28 3.175,85.09 33.02,85.09 41.275,76.835 65.405,76.835
++5V on Top Layer "BottomLayer-No Net" (solid, pour order 26): 3.175,100.33 19.05,100.33 19.05,85.725 3.175,85.725
+24V on Top Layer "BottomLayer-No Net" (solid, pour order 29): 98.425,76.835 55.88,76.835 31.75,100.965 3.175,100.965 3.175,107.315 33.02,107.315 58.42,81.915 98.425,81.915

## Other copper
Top Layer:
  text "Busdriver 4 Rack V1" at 0.635,44.45 h2.5
  text "Chicken 2012 IQOQI" at 0.635,41.91 h2.5

## Silkscreen, mask and mechanical layers (free items; w line width, h text height)
Mechanical 1:
  lines w0.254: 0,-12.754 0,-12.246 ; 1.524,-13.008 0,-12.5 ; 1.524,-11.992 0,-12.5 ; 44.261,-12.5 0,-12.5 ; 55.739,-12.5 100,-12.5 ; 98.476,-13.008 100,-12.5 ; 98.476,-11.992 100,-12.5 ; 100,-12.754 100,-12.246 ; 114.492,1.524 115,0 ; 114.492,128.476 115,130 ; 114.746,0 115.254,0 ; 114.746,130 115.254,130 ; 115,59.261 115,0 ; 115,70.739 115,130 ; 115.508,1.524 115,0 ; 115.508,128.476 115,130
  text "130 (mm)" at 115.914,59.515 h1.52 r90
  text "100 (mm)" at 44.515,-13.414 h1.52

## Text inside footprints (layer, text, board x,y; h text height)
P1: Top Overlay "2" at 36.957,77.47 h1.27 r270; Top Overlay "1" at 34.417,77.47 h1.27 r270; Top Overlay "49" at 34.417,11.938 h1.27 r270; Top Overlay "50" at 36.957,11.938 h1.27 r270
P2: Top Overlay "21" at 57.905,46.335 h1.5 r270; Top Overlay "11" at 57.905,71.335 h1.5 r270; Top Overlay "32" at 57.905,18.395 h1.5 r270; Top Overlay "c" at 62.365,98.095 h1.5 r270; Top Overlay "a" at 67.445,98.095 h1.5 r270; Top Overlay "1" at 57.905,96.135 h1.5 r270
P3: Top Overlay "21" at 85.21,46.335 h1.5 r270; Top Overlay "11" at 85.21,71.335 h1.5 r270; Top Overlay "32" at 85.21,18.395 h1.5 r270; Top Overlay "c" at 89.67,98.095 h1.5 r270; Top Overlay "a" at 94.75,98.095 h1.5 r270; Top Overlay "1" at 85.21,96.135 h1.5 r270